# Altium PCB RF_PCB1.PcbDoc
Units mil, origin at the board's own origin, x right, y up, seen from the top; angles counter-clockwise.
Board outline 6000 x 4000 mil, 2 copper layers (Top Layer, Bottom Layer); 73 components, 50 nets, 311 pads, 15 vias.
Unrouted connection lines stored in the file: 181.
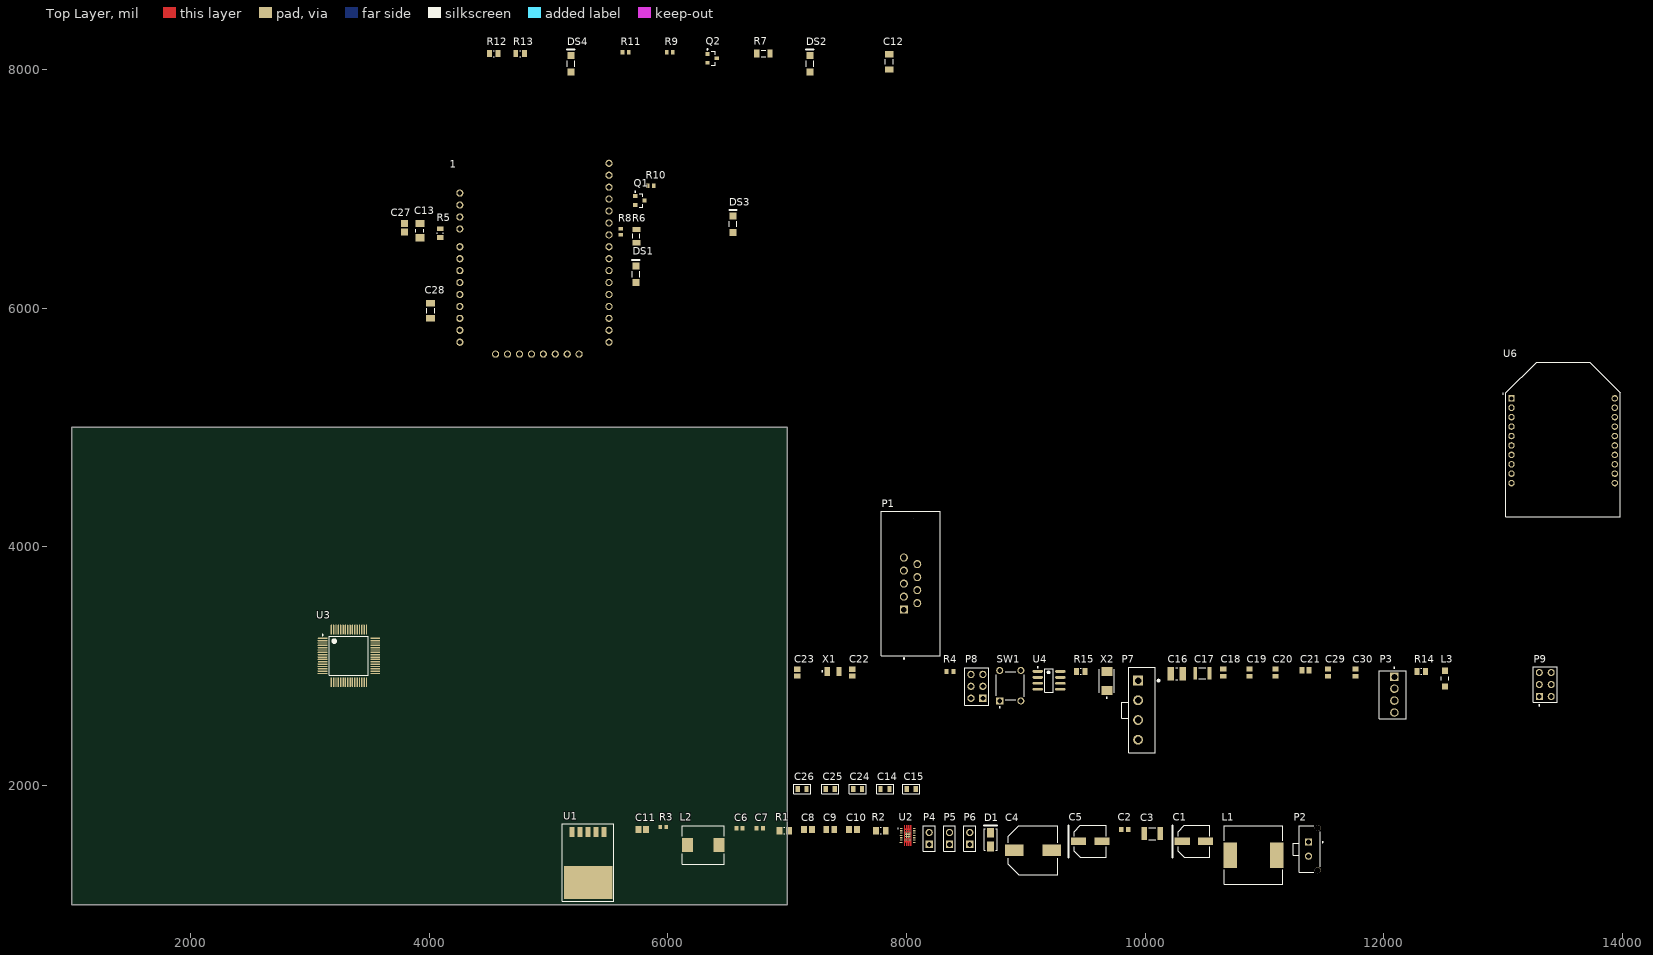
[diagram p0: Top Layer view]
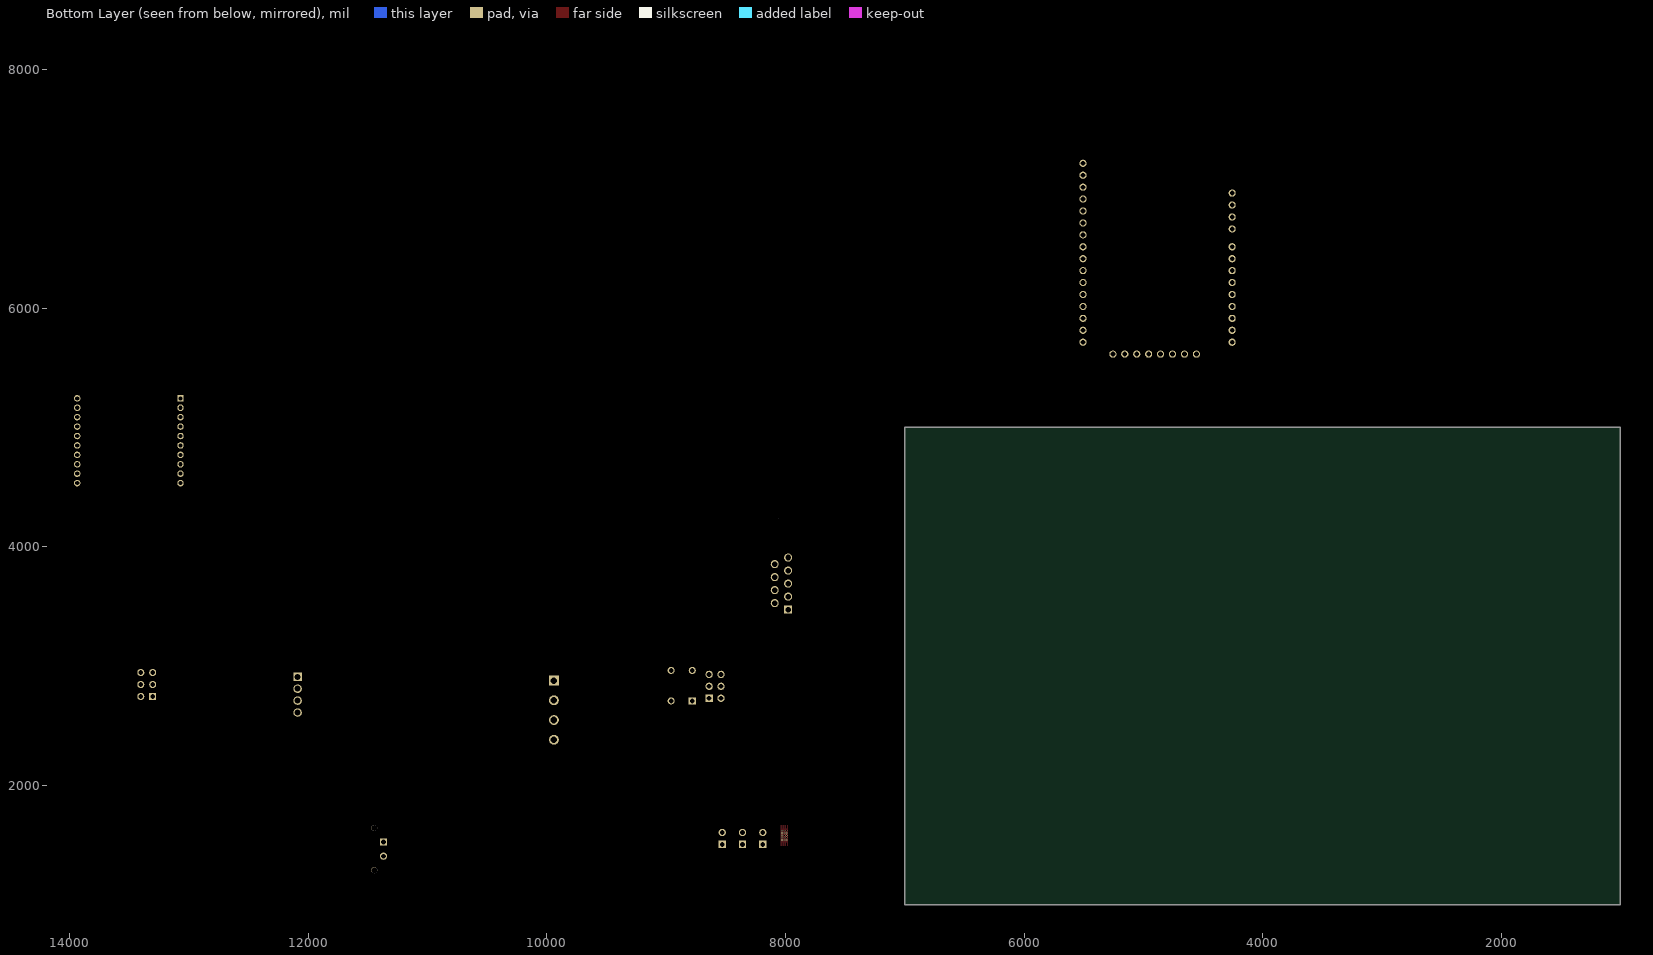
[diagram p1: Bottom Layer view, seen from below]

## Layer stack, top to bottom
Top Solder: solder mask 0.4, Solder Resist, Dk 3.5
Top Layer: signal copper 1.4
Dielectric 1: dielectric 12.6, FR-4, Dk 4.8
Bottom Layer: signal copper 1.4
Bottom Solder: solder mask 0.4, Solder Resist, Dk 3.5

## Board outline
1000,1000 7000,1000 7000,5000 1000,5000

## Design rules (kind name [scope] priority, off if disabled: settings)
Clearance [All] p1: gap=6 ignorepadtopadclearanceinfootprint=FALSE
HoleSize [All] p1: absolutevalues=TRUE maxlimit=3937.01 minlimit=15.75 maxpercent=80.000 minpercent=20.000
PolygonConnect [All] p1: connectstyle=Relief reliefconductorwidth=10 reliefentries=4 polygonreliefangle="90 Angle" airgapwidth=10
RoomDefinition RF_STM [InComponentClass('RF_STM')] p1: confinementstyle=ConfineIn formatcopy=TRUE lockcomponents=FALSE outline 7045,1920 8145,1920 8145,2120 7045,2120
RoutingVias [All] p1: holewidth=15.75 width=31.5 viastyle="Through Hole" minholewidth=15.75 minwidth=23.62 maxholewidth=3937.01 maxwidth=3937.01
SilkToSilkClearance [All] p1: silktosilkclearance=0
SilkToSolderMaskClearance [IsPad] p1: minsilkscreentomaskgap=0 clearancetoexposedcopper=TRUE
SolderMaskExpansion [All] p1: expansion=4
Width solarwidth [All] p1 off: maxlimit=10 minlimit=5 preferedwidth=5 minimp=50.000000 maximp=50.000000 favimp=50.000000
Width [All] p2: maxlimit=100 minlimit=6 preferedwidth=6 minimp=50.000000 maximp=50.000000 favimp=50.000000
27 further rules are at their usual default settings.

## Classes and differential pairs
component class RF_Xbee: 1 C12 C13 C27 C28 DS1 DS2 DS3 DS4 Q1 Q2 R5 R6 R7 R8 R9 R10 R11 R12 R13 U6
component class RF_STM: C14 C15 C16 C17 C18 C19 C20 C21 C22 C23 C24 C25 C26 C29 C30 L3 P1 P3 P7 P8 P9 R4 R14 R15 SW1 U3 U4 X1 X2
component class RF_Power: C1 C2 C3 C4 C5 C6 C7 C8 C9 C10 C11 D1 L1 L2 P2 P4 P5 P6 R1 R2 R3 U1 U2

## Components (designator, comment, footprint, x,y, rotation, side; value= is the part's Value field where it differs from the comment)
1 "XBEE_SMD_ADAPTER" XBEE_SMD_ADAPTER 4905,6465 r0 top
C1 "47uF" PNSC-FP-V-D_V 10410,1529.72 r0 top
C2 "0.1uF" CAPC1608X90X35ML10T15 9830,1629.72 r0 top
C3 "100uF" MURA-1210_H_2.7_M 10060,1594.72 r0 top
C4 "680uF" NIC-CAPA2-10X10_V 9060,1454.72 r0 top
C5 "47uF" PNSC-FP-V-D_V 9540,1529.72 r0 top
C6 "10uF" CAPC1608X90X35NL10T15 6600,1639.72 r0 top
C7 "10uF" CAPC1608X90X35NL10T15 6770,1639.72 r0 top
C8 "22uF" CAPC2013X140X45NL15T25 7175,1629.72 r0 top
C9 "22uF" CAPC2013X140X45NL15T25 7360,1629.72 r0 top
C10 "22uF" CAPC2013X140X45NL15T25 7550,1629.72 r0 top
C11 "C0805C104K5RACTU" CAPC2013X88X50NL20T25 5785,1629.72 r0 top
C12 "0.01uF" CAPC1206(3216)170_M 7855,8065 r90 top value=10nF
C13 "1uF" CAPC3216X180X50ML20T25 3920,6650 r270 top
C14 "0.1uF" C0805 7820,1970 r0 top
C15 "1uF" C0805 8040,1970 r0 top
C16 "10uF" CAPC3326X280X60LL40T25 10265,2935 r0 top
C17 "1uF" CAPC3225X270X30LL30 10480,2940 r0 top
C18 "0.1uF" CAPC2013X135X50LL10T20 10655,2945 r90 top
C19 "0.1uF" CAPC2013X135X50LL10T20 10875,2945 r90 top
C20 "0.1uF" CAPC2013X135X50LL10T20 11095,2945 r90 top
C21 "0.1uF" CAPC2013X135X50LL10T20 11345,2965 r0 top
C22 "6nF" CAPC2013X140X50LL20T25 7545,2945 r90 top
C23 "6nF" CAPC2013X140X50LL20T25 7085,2945 r90 top
C24 "20pF" C0805 7590,1970 r0 top
C25 "20pF" C0805 7360,1970 r0 top
C26 "0.1uF" C0805 7125,1970 r0 top
C27 "100pF" CAPC2013X88X50ML20T25 3790,6675 r270 top
C28 "0.01uF" CAPC1206(3216)170_M 4010,5980 r90 top value=10nF
C29 "0.1uF" CAPC2013X135X50LL10T20 11535,2945 r90 top
C30 "0.1uF" CAPC2013X135X50LL10T20 11765,2945 r90 top
D1 "SMAJ36A" LFUS-DO-214AC-2_L 8705,1544.72 r90 top
DS1 "HSMH-C150" AVAG-HSMX-C150_V 5730,6285 r90 top
DS2 "HSMH-C150" AVAG-HSMX-C150_V 7190,8050 r90 top
DS3 "HSMH-C150" AVAG-HSMX-C150_V 6545,6705 r90 top
DS4 "HSMH-C150" AVAG-HSMX-C150_V 5185,8050 r90 top
L1 "7447709101" WE-PD-XXL 10910,1414.72 r0 top
L2 "7443340150" WE-HCC-8070 6295,1499.72 r0 top
L3 "7427921" SMD-1206 12515,2895 r90 top
P1 "171-009-113R911" NORCO-171-009-113R911_V 8034.09,3691.42 r90 top
P2 "66200211122" 66200211122 11380,1464.72 r90 top
P3 "640456-4" TECO-640456-4 12090,2760 r90 top
P4 "12V EXT" SMTC-TSW-102-26-XX-S 8190,1504.72 r90 top
P5 "5V EXT" SMTC-TSW-102-26-XX-S 8360,1504.72 r90 top
P6 "3V3 EXT" SMTC-TSW-102-26-XX-S 8530,1504.72 r90 top
P7 "64900411122" 64900411122 9975,2630 r90 top
P8 "SWD" SMTC-TSW-103-08-X-D 8640,2730 r90 top
P9 "M20-9980346" HRWN-M20-9980346_V 13355,2845 r90 top
Q1 "BJT" ONSC-SOT-23-3-318-08_V 5764.37,6902.6 r0 top
Q2 "BJT" ONSC-SOT-23-3-318-08_V 6370,8095 r0 top
R1 "1M" RESC2013X50X30ML20T20 6975,1619.72 r0 top
R2 "1M" RESC2013X50X30ML20T20 7785,1619.72 r0 top
R3 "180K" RESC1608X55X30LL15T15 5960,1649.72 r0 top
R4 "1K" RESC1608X55X25ML10T15 8365,2955 r0 top
R5 "1K" RESC2013X50X30NL20T20 4090,6630 r270 top
R6 "464 Ohm" RESC3216X70X50NL05T20 5735,6605 r270 top
R7 "464 Ohm" RESC3216X70X50NL05T20 6800,8135 r0 top
R8 "10K" RESC1609X50X30NL8T20 5605,6640.59 r90 top
R9 "10K" RESC1609X50X30NL8T20 6015,8145 r0 top
R10 "10K" RESC1609X50X30NL8T20 5855.59,7025 r0 top
R11 "10K" RESC1609X50X30NL8T20 5645,8145 r0 top
R12 "1K" RESC2013X50X30NL20T20 4540,8135 r0 top
R13 "1K" RESC2013X50X30NL20T20 4760,8135 r0 top
R14 "1K" RESC2013X50X30NL20T20 12315,2955 r0 top
R15 "1K" RESC2013X50X30NL20T20 9460,2955 r0 top
SW1 "PTS645SM43SMTR92LFS" ITT-PTS645S-4_V 8870,2835 r90 top
U1 "LM2576SX-5.0" TO263-5 5330,1480 r270 top
U2 "TPS63020DSJT" DSJ14-4000X1580TP_V 8010,1579.72 r0 top
U3 "STM32F107RCT6" STM-LQFP64_M 3325,3085 r0 top
U4 "MCP2551-I/SN" SOIC-SN8_N 9195,2880 r0 top
U6 "XBP24CAUIT-001" *MODULE_XBP24CAUIT-001 13505,4900 r0 top
X1 "32.768KHz" ABRA-ABS07-2_V 7385,2955 r0 top
X2 "8MHz" ABRA-ABM3-2_V 9680,2875 r90 top

## Footprints (in the part's own frame and the unit in brackets; to place one, negate y for a bottom-side part, rotate by r counter-clockwise, add the part's x,y. Pads: shape width x height; smd on the part's side, far side on the other; paste and mask are expansions set on the pad)
64900411122 [mm] "4.20mm Male Single Row Vertical Header, 4p"
  rect 2.1x2.1 hole 1.4: 1(6.3,0.85)
  round 2.1 hole 1.4: 2(2.1,0.85) 3(-2.1,0.85) 4(-6.3,0.85)
  silkscreen extent -9.1,-3.7 9.1,4.3, body extent -9,-2.7 9,4.2, height 12.83
66200211122 [mm] "3.00mm Male Single Row Vertical Header, 2p"
  rect 1.52x1.52 hole 1.02: 1(1.5,0.255)
  round 1.52 hole 1.02: 2(-1.5,0.255)
  round 1.27 hole 1.27 unplated: MH1(-4.5,-1.705) MH2(4.5,-1.705)
  silkscreen extent -4.95,-2.88 4.95,3.46, body extent -4.83,-2.18 4.83,3.38, height 9.93
*MODULE_XBP24CAUIT-001 [mil]
  rect 54.25x54.25 hole 34.25: 1(-433,344.5)
  round 54.25 hole 34.25: 2(-433,265.5) 3(-433,186.5) 4(-433,107.5) 5(-433,28.5) 6(-433,-50.5) 7(-433,-129.5) 8(-433,-208.5) 9(-433,-287.5) 10(-433,-366.5) 11(433,-366.5) 12(433,-287.5) 13(433,-208.5) 14(433,-129.5) 15(433,-50.5) 16(433,28.5) 17(433,107.5) 18(433,186.5) 19(433,265.5) 20(433,344.5)
  silkscreen extent -508,-648 480,648
ABRA-ABM3-2_V [mm] "SMD, 2-Leads, Body 5x3.2mm, Pitch 4.1mm"
  rect 1.9x2.4 smd: 1(-2.05,0) 2(2.05,0)
  silkscreen extent -3.67,-1.6 2.5,1.6, body extent -2.5,-1.6 2.5,1.6, height 1.3
ABRA-ABS07-2_V [mm] "Hand Drawn, 2-Leads, Body 3.2x1.5mm, Pitch 2.5mm"
  rect 1.1x1.9 smd: 1(-1.25,0) 2(1.25,0)
  silkscreen extent -2.47,-0.12 -2.22,0.12, body extent -1.6,-0.75 1.6,0.75, height 0.9
AVAG-HSMX-C150_V [mm] "SMD, 2-Leads, Body 3.2x1.6mm"
  rect 1.5x1.5 smd: 1(-1.75,0) 2(1.75,0)
  silkscreen extent -0.6,-0.8 3,0.8, body extent -1.6,-0.8 1.6,0.8, height 1.1
C0805 [mm]
  rect 0.9x1.3 smd: 1(-0.95,0) 2(0.95,0)
  silkscreen extent -1.8,-1 1.8,1, body extent -1.05,-0.67 1.05,0.67, height 0.94
CAPC1206(3216)170_M [mm] "Chip Capacitor, Body 3.2x1.6mm, Height 1.7mm, IPC Low Density"
  rect 1.35x1.9 smd: 1(-1.6,0) 2(1.6,0)
  silkscreen extent -0.55,-0.85 0.55,0.85, body extent -1.7,-0.9 1.7,0.9, height 1.7
CAPC1608X90X35ML10T15 [mm] "Chip Capacitor, 2-Leads, Body 1.7x0.9mm, IPC Low Density"
  rect 0.95x1.05 smd: 1(-0.725,0) 2(0.725,0)
  body extent -0.85,-0.45 0.85,0.45, height 0.9
CAPC1608X90X35NL10T15 [mm] "Chip Capacitor, 2-Leads, Body 1.60x0.80mm, IPC Medium Density"
  rect 0.85x0.95 smd: 1(-0.675,0) 2(0.675,0)
  body extent -0.85,-0.45 0.85,0.45, height 0.9
CAPC2013X88X50ML20T25 [mm] "Chip Capacitor, 2-Leads, Body 2.00x1.25mm, IPC Low Density"
  rect 1.5x1.55 smd: 1(-0.9,0) 2(0.9,0)
  body extent -1.1,-0.72 1.1,0.72, height 0.88
CAPC2013X88X50NL20T25 [mm] "Chip Capacitor, 2-Leads, Body 2.00x1.25mm, IPC Medium Density"
  rect 1.3x1.45 smd: 1(-0.8,0) 2(0.8,0)
  body extent -1.1,-0.72 1.1,0.72, height 0.88
CAPC2013X135X50LL10T20 [mm] "Chip Capacitor, 2-Leads, Body 2.00x1.25mm, IPC High Density"
  rect 1x1.3 smd: 1(-0.75,0) 2(0.75,0)
  body extent -1.05,-0.67 1.05,0.68, height 1.35
CAPC2013X140X45NL15T25 [mm] "Chip Capacitor, 2-Leads, Body 2.00x1.25mm, IPC Medium Density"
  rect 1.25x1.45 smd: 1(-0.85,0) 2(0.85,0)
  body extent -1.08,-0.7 1.07,0.7, height 1.4
CAPC2013X140X50LL20T25 [mm] "Chip Capacitor, 2-Leads, Body 2.00x1.25mm, IPC High Density"
  rect 1.1x1.35 smd: 1(-0.7,0) 2(0.7,0)
  body extent -1.1,-0.72 1.1,0.72, height 1.4
CAPC3216X180X50ML20T25 [mm] "Chip Capacitor, 2-Leads, Body 3.40x1.80mm, IPC Low Density"
  rect 1.5x1.9 smd: 1(-1.5,0) 2(1.5,0)
  silkscreen extent -0.35,-0.85 0.35,0.85, body extent -1.7,-0.9 1.7,0.9, height 1.8
CAPC3225X270X30LL30 [mm] "Chip Capacitor, 2-Leads, Body 3.5x2.7mm, IPC High Density"
  rect 0.75x2.6 smd: 1(-1.525,0) 2(1.525,0)
  silkscreen extent -0.75,-1.2 0.75,1.2, body extent -1.75,-1.35 1.75,1.35, height 2.7
CAPC3326X280X60LL40T25 [mm] "Chip Capacitor, 2-Leads, Body 3.70x2.90mm, IPC High Density"
  rect 1.4x2.8 smd: 1(-1.3,0) 2(1.3,0)
  silkscreen extent -0.2,-1.3 0.2,1.3, body extent -1.85,-1.45 1.85,1.45, height 2.8
DSJ14-4000X1580TP_V [mm] "SON, 14-Leads, Body 4.15x3.15mm, Pitch 0.5mm"
  oval 0.6x0.24 smd mask+0.07: 1(-1.4,1.5) 2(-1.4,1) 3(-1.4,0.5) 4(-1.4,0) 5(-1.4,-0.5) 6(-1.4,-1) 7(-1.4,-1.5) 8(1.4,-1.5) 9(1.4,-1) 10(1.4,-0.5) 11(1.4,0) 12(1.4,0.5) 13(1.4,1) 14(1.4,1.5)
  rect 1x1 smd paste-1: 15(0,0)
  Top Layer region: -0.79,-2.2 -0.59,-2.2 -0.59,-1.425 -0.33,-1.425 -0.33,-2.2 -0.13,-2.2 -0.13,-1.425 0.13,-1.425 0.13,-2.2 0.33,-2.2 0.33,-1.425 0.59,-1.425 0.59,-2.2 0.79,-2.2 0.79,2.2 0.59,2.2 0.59,1.425 0.33,1.425 0.33,2.2 0.13,2.2 0.13,1.425 -0.13,1.425 -0.13,2.2 -0.33,2.2 -0.33,1.425 -0.59,1.425 -0.59,2.2 -0.79,2.2
  silkscreen extent -2.15,1.45 -2.05,1.55, body extent -1.58,-2.07 1.58,2.07, height 1
HRWN-M20-9980346_V [mm] "THD, 6-Leads, Body 7.62x5.08mm, Pitch 2.54mm"
  rect 1.5x1.5 hole 1: 1(-2.54,1.27)
  round 1.5 hole 1: 2(-2.54,-1.27) 3(0,1.27) 4(0,-1.27) 5(2.54,1.27) 6(2.54,-1.27)
  silkscreen extent -4.58,-2.54 3.81,2.54, body extent -3.81,-2.54 3.81,2.54, height 8.64
ITT-PTS645S-4_V [mm] "TH, 4-Leads, Body 6x6mm"
  rect 1.5x1.5 hole 1: 1(-3.25,2.25)
  round 1.5 hole 1: 2(3.25,2.25) 3(-3.25,-2.25) 4(3.25,-2.25)
  silkscreen extent -4.67,-3 3,3, body extent -3,-3 3,3, height 4.4
LFUS-DO-214AC-2_L [mm] "Molded Diode, 2-Leads, Body 4.6x2.79mm, IPC High Density"
  rect 2.1x1.45 smd: 1(-1.45,0) 2(1.45,0)
  silkscreen extent -2.3,-1.4 3,1.4, body extent -2.52,-1.4 2.52,1.4, height 2.29
MURA-1210_H_2.7_M [mm] "Chip Capacitor, 2-Leads, Body 3.5x2.7mm, IPC Low Density"
  rect 1.15x2.8 smd: 1(-1.725,0) 2(1.725,0)
  silkscreen extent -0.75,-1.3 0.75,1.3, body extent -1.75,-1.35 1.75,1.35, height 2.7
NIC-CAPA2-10X10_V [mm] "Aluminum Electrolytic Capacitor, Diameter 10mm, Height 10.8mm, Pitch 8mm"
  rect 4x2.5 smd: 1(-4,0) 2(4,0)
  silkscreen extent -5.25,-5.25 5.25,5.25, body extent -4.96,-4.99 5,4.99, height 10.8
NORCO-171-009-113R911_V [mm] "THD, 9-Leads, Body 30.8x12.6mm, Pitch 2.77mm"
  rect 1.7x1.7 hole 1.194: 1(-5.54,1.42)
  round 1.7 hole 1.194: 2(-2.77,1.42) 3(0,1.42) 4(2.77,1.42) 5(5.54,1.42) 6(-4.155,-1.42) 7(-1.385,-1.42) 8(1.385,-1.42) 9(4.155,-1.42)
  round 2.9 hole 3.2 unplated: MH1(-12.495,0) MH2(12.495,0)
  silkscreen extent -16.08,-6.3 15.4,6.3, body extent -15.4,-6.3 15.41,6.3, height 13.24
ONSC-SOT-23-3-318-08_V [mm] "SOT23, 3-Leads, Body 2.92x1.3mm, Pitch 0.95mm"
  rect 0.9x0.8 smd: 1(-1,0.95) 2(-1,-0.95) 3(1,0)
  silkscreen extent -1.12,-1.46 0.65,2.02, body extent -0.65,-1.46 0.65,1.46, height 1.11
PNSC-FP-V-D_V [mm] "CAPAE, 2-Leads, Body 6.80x6.80mm"
  rect 3.2x1.6 smd: 1(-2.5,0) 2(2.5,0)
  silkscreen extent -4.6,-3.4 3.4,3.4, body extent -3.9,-3.4 3.9,3.4, height 6.1
RESC1608X55X25ML10T15 [mm] "Chip Resistor, 2-Leads, Body 1.60x0.80mm, IPC Low Density"
  rect 0.8x1 smd: 1(-0.75,0) 2(0.75,0)
  body extent -0.85,-0.45 0.85,0.45, height 0.55
RESC1608X55X30LL15T15 [mm] "Chip Resistor, 2-Leads, Body 1.60x0.80mm, IPC High Density"
  rect 0.7x0.85 smd: 1(-0.625,0) 2(0.625,0)
  body extent -0.87,-0.48 0.87,0.48, height 0.55
RESC1609X50X30NL8T20 [mm] "Chip Resistor, 2-Leads, Body 1.65x0.95mm, IPC Medium Density"
  rect 0.8x0.95 smd: 1(-0.65,0) 2(0.65,0)
  body extent -0.82,-0.48 0.82,0.48, height 0.5
RESC2013X50X30ML20T20 [mm] "Chip Resistor, 2-Leads, Body 2.00x1.25mm, IPC Low Density"
  rect 1.25x1.55 smd: 1(-1.025,0) 2(1.025,0)
  silkscreen extent -0.1,-0.67 0.1,0.67, body extent -1.1,-0.72 1.1,0.72, height 0.5
RESC2013X50X30NL20T20 [mm] "Chip Resistor, 2-Leads, Body 2.00x1.25mm, IPC Medium Density"
  rect 1.05x1.45 smd: 1(-0.925,0) 2(0.925,0)
  silkscreen extent -0.1,-0.63 0.1,0.63, body extent -1.1,-0.72 1.1,0.72, height 0.5
RESC3216X70X50NL05T20 [mm] "Chip Resistor, 2-Leads, Body 3.20x1.60mm, IPC Medium Density"
  rect 1.1x1.65 smd: 1(-1.425,0) 2(1.425,0)
  silkscreen extent -0.5,-0.72 0.5,0.72, body extent -1.63,-0.82 1.62,0.82, height 0.7
SMD-1206 [mm] "Chip Inductor, 2-Leads, Body 3.2x1.6mm"
  rect 1.35x1.2 smd: 1(-1.675,0) 2(1.675,0)
  silkscreen extent -0.35,-0.8 0.35,0.8, body extent -1.6,-0.8 1.6,0.8, height 1.09
SMTC-TSW-102-26-XX-S [mm] ".025 SQ Post Terminal Strip Assembly, 1x2 Pins, Vertical, 2.54mm Pitch, Male"
  rect 1.55x1.55 hole 1.02: 1(0,0)
  round 1.55 hole 1.02: 2(2.54,0)
  silkscreen extent -1.46,-1.27 4,1.27, body extent -1.4,-1.27 3.81,1.27, height 8.38
SMTC-TSW-103-08-X-D [mm] ".025 SQ Post Terminal Strip Assembly, 2x3 Pins, Vertical, 2.54mm Pitch, Male"
  rect 1.55x1.55 hole 1.02: 1(0,0)
  round 1.55 hole 1.02: 2(0,2.54) 3(2.54,0) 4(2.54,2.54) 5(5.08,0) 6(5.08,2.54)
  silkscreen extent -1.46,-1.27 6.54,3.81, body extent -1.27,-1.27 6.35,3.81, height 8.38
SOIC-SN8_N [mm] "SOIC, 8-Leads, Body 4.9x3.9mm, Pitch 1.27mm, IPC Medium Density"
  oval 2.2x0.6 smd: 1(-2.4,1.905) 2(-2.4,0.635) 3(-2.4,-0.635) 4(-2.4,-1.905) 5(2.4,-1.905) 6(2.4,-0.635) 7(2.4,0.635) 8(2.4,1.905)
  silkscreen extent -2.52,-2.5 0.9,2.88, body extent -2,-2.5 2,2.5, height 1.75
STM-LQFP64_M [mm] "Thin QFP, 64-Leads, Body 10x10mm, Pitch 0.5mm, IPC Low Density"
  oval 2.1x0.3 smd: 1(-5.6,3.75) 2(-5.6,3.25) 3(-5.6,2.75) 4(-5.6,2.25) 5(-5.6,1.75) 6(-5.6,1.25) 7(-5.6,0.75) 8(-5.6,0.25) 9(-5.6,-0.25) 10(-5.6,-0.75) 11(-5.6,-1.25) 12(-5.6,-1.75) 13(-5.6,-2.25) 14(-5.6,-2.75) 15(-5.6,-3.25) 16(-5.6,-3.75) 33(5.6,-3.75) 34(5.6,-3.25) 35(5.6,-2.75) 36(5.6,-2.25) 37(5.6,-1.75) 38(5.6,-1.25) 39(5.6,-0.75) 40(5.6,-0.25) 41(5.6,0.25) 42(5.6,0.75) 43(5.6,1.25) 44(5.6,1.75) 45(5.6,2.25) 46(5.6,2.75) 47(5.6,3.25) 48(5.6,3.75)
  oval 0.3x2.1 smd: 17(-3.75,-5.6) 18(-3.25,-5.6) 19(-2.75,-5.6) 20(-2.25,-5.6) 21(-1.75,-5.6) 22(-1.25,-5.6) 23(-0.75,-5.6) 24(-0.25,-5.6) 25(0.25,-5.6) 26(0.75,-5.6) 27(1.25,-5.6) 28(1.75,-5.6) 29(2.25,-5.6) 30(2.75,-5.6) 31(3.25,-5.6) 32(3.75,-5.6) 49(3.75,5.6) 50(3.25,5.6) 51(2.75,5.6) 52(2.25,5.6) 53(1.75,5.6) 54(1.25,5.6) 55(0.75,5.6) 56(0.25,5.6) 57(-0.25,5.6) 58(-0.75,5.6) 59(-1.25,5.6) 60(-1.75,5.6) 61(-2.25,5.6) 62(-2.75,5.6) 63(-3.25,5.6) 64(-3.75,5.6)
  silkscreen extent -5.72,-4.15 4.15,4.57, body extent -5,-5 5,5, height 1.6
TECO-640456-4 [mm] "Through Hole, 4-Leads, Body 10.16x5.72mm, Pitch 2.54mm"
  rect 1.8x1.8 hole 1.27 paste+0: 1(3.81,0)
  round 1.8 hole 1.27 paste+0: 2(1.27,0) 3(-1.27,0) 4(-3.81,0)
  silkscreen extent -5.08,-2.54 5.86,3.18, body extent -5.08,-2.54 5.08,3.18, height 10.03
TO263-5 [mm]
  rect 2.16x1.07 smd: 1(-3.25,3.4) 2(-3.25,1.7) 3(-3.25,0) 4(-3.25,-1.7) 5(-3.25,-3.4)
  rect 6.99x10.3 smd: 6(7.5,0)
  silkscreen extent -5,-5.5 11.5,5.5, body extent -3.81,-5 12.5,4.91, height 4.22
WE-HCC-8070 [mm] "Inductor, 2-Leads, Body 8.4 x 7.9 mm"
  rect 2.3x3 smd: 1(-3.35,0) 2(3.35,0)
  silkscreen extent -4.45,-4.1 4.45,4.1, body extent -4.2,-3.96 4.2,3.94, height 7.15
WE-PD-XXL [mm] "SMD Inductor, 2-Leads, Body 12.0 x 12.0 mm"
  rect 2.9x5.4 smd: 1(-4.95,0) 2(4.95,0)
  silkscreen extent -6.25,-6.25 6.25,6.25, body extent -6,-6 6,6, height 10.36
XBEE_SMD_ADAPTER [mil]
  round 60.24 / inner round 60 / far side round 60.24 hole 40.16: 1(-650,500) 2(-650,400) 3(-650,300) 4(-650,200) 5(-650,50) 6(-650,-50) 7(-650,-150) 8(-650,-250) 9(-650,-350) 10(-650,-450) 11(-650,-550) 12(-650,-650) 13(-650,-750) 14(-350,-850) 15(-250,-850) 16(-150,-850) 17(-50,-850) 18(50,-850) 19(150,-850) 20(250,-850) 21(350,-850) 22(600,-750) 23(600,-650) 24(600,-550) 25(600,-450) 26(600,-350) 27(600,-250) 28(600,-150) 29(600,-50) 30(600,50) 31(600,150) 32(600,250) 33(600,350) 34(600,450) 35(600,550) 36(600,650) 37(600,750)

## Part data
C1 C5: library part CMP-2000-06216-1, "Aluminum Electrolytic Capacitor, 47 uF, +/- 20%, 35 V, 2-Pin SMD (Size Code D), -55 to 105 degC, RoHS, Tape and Reel", Capacitance=47µF, Case Size/Dimension=Ø6.3x5.8mm, ESR (Equivalent Series Resistance)=0.26O, Lifetime@Temperature=2000Hrs@105°C, Manufacturer=Panasonic, Operating Temp-Max=105°C, Operating Temp Range=-55to+105°C, Package Description="2-Pin Electrolytic Aluminum Capacitor, Body 6.6 x 6.6 mm", Package Reference=FP-V-D, Rated Voltage=35V, Ripple Current=300mA, Datasheet URL=http://industrial.panasonic.com/cdbs/www-data/pdf/RDE0000/ABA0000C1184.pdf, Datasheet Version=03/2016, Manufacturer URL=http://www.panasonic.com/, Mounting Technology=SurfaceMount, Package URL=http://industrial.panasonic.com/cdbs/www-data/pdf/RDE0000/DME0000COL48.pdf, Series=FP, Type=Can
C2: library part CMP-2000-04945-1, "Chip Capacitor, 22 pF, +/- 5%, 50 V, -55 to 125 degC, 0603 (1608 Metric), RoHS, Tape and Reel", Capacitance=22pF, Case Size/Dimension=0603, Dielectric=C0G, Manufacturer=Murata, Package Description="2-Pin Surface Mount Device, Body 1.6 x 0.8 mm", Package Reference=603, Rated Voltage=50V, Tolerance (%)=±5%, Datasheet URL=https://datasheet.ciiva.com/11786/0900766b807a1cab-11786398.pdf, Datasheet Version=Jul-06, Manufacturer URL=http://www.murata.com/
C3: library part CMP-2000-05259-1, "CAP, Ceramic, 100 uF, 20%, 6.3 V, 1210, RoHS, Tape and Reel", Dielectric=X5R, Manufacturer=MurataElectronics, Operating Temperature=-55to85degC, Package/Case=1210, Package Description="2-Pin Surface Mount Device, Body 3.2 x 2.5 mm", Tolerance=20%, Voltage=6.3Vdc, Capacitance Value=100uF, Category=CapacitorCeramicMultilayer, Construction=Flat, Datasheet URL=https://datasheet.ciiva.com/29199/455114-da-01-en-vs-kondensator-1210-29199468.pdf, Datasheet Version=Dec-10, Manufacturer URL=http://www.murata.com/, Mounting=SurfaceMount, Package Reference=1210, Product Depth=2.5mm, Product Height=2.5mm, Product Length=3.2mm, Rad Hard=No, Type=Flat
C4: library part CMP-0687-00005-1, "Aluminum Electrolytic Capacitor, UD Series, Low Impedance, 680 uF, 16 V, + / - 20%, -55 to 105 degC, Chip Type, 10 x 10 mm D x L, Pb-Free, Reel", Manufacturer=Nichicon, PartNumber=UUD1C681MNL1GS, Rated Capacitance="680 uF", Rated Ripple Current (at 100kHz)="670 mA", Rated Voltage="16 V", Tolerance Rated Capacitance="-20 to 20%", ComponentLink1Description="Manufacturer URL", ComponentLink1URL=http://www.nichicon.co.jp/, ComponentLink2Description=Datasheet, ComponentLink2URL=http://products.nichicon.co.jp/en/pdf/XJA043/e-ud.pdf, ComponentLink3Description="Package Specification", ComponentLink3URL=http://products.nichicon.co.jp/en/pdf/XJA043/e-ud.pdf, DatasheetVersion=08/2012, Diameter="10 mm", Endurance Time="5000 h", Impedance="0.09 Ohm", Length="10 mm", Mounting Technology="Surface Mount", PackageDescription="2-Pin Surface Mount Device, Diameter 10 mm, Height 10 mm, Pitch 8 mm", PackageReference=CAPAE-D10H10, Packing="Dia382mm Reel", RoHS=TRUE
C6 C7: library part CMP-2006-02792-1, Manufacturer=Murata, Part Number=GRM188R60J106ME47D
C8 C9 C10: library part CMP-2007-03385-1, Manufacturer=Murata, Part Number=GRM21BR60J226ME39L
C11: library part CMP-2007-00279-1, Manufacturer=Kemet, Part Number=C0805C104K5RACTU
C12 C28: library part CMP-1037-03508-1, "CAP 10nF 50V ±5% 1206 (3216 Metric) Thickness 1.7mm SMD", Case-EIA=1206, Case-Metric=3216, Rated Voltage="50 V", Tolerance=±5%, Max Thickness="1.7 mm", Technology=SMT
C13: library part CMP-2000-04991-1, "Chip Capacitor, 1 uF, +/- 10%, 25 V, -55 to 125 degC, 1206 (3216 Metric), RoHS, Tape and Reel", Capacitance - nF=1000nF, Case Code - in=1206, Case Code - mm=3216, Case Height=1.6mm, Case Length=3.2mm, Dielectric=X7R, Manufacturer=Kemet, Maximum Operating Temperature=+125C, Minimum Operating Temperature=-55C, Operating Temperature Range=-55Cto+125C, Package / Case=1206(3216metric), Package Description="2-Pin Surface Mount Device, Body 3.2 x 1.6 mm", Temperature Coefficient / Code=+/-15%, Tolerance=10%, Voltage Rating=25V, =C1206C105K3RAC7800, Brand=Kemet, Capacitance=1uF, Case Width=1.6mm, Class=Class1, Datasheet URL=https://ciiva.com/datasheet-click-18194173?src=ciiva&sig=6daff8c4, Datasheet Version=Jul-14, Dimensions=1.6mmWx3.2mmLx1.6mmH, Factory Pack Quantity=2000, Manufacturer URL=http://www.kemet.com/, Package Reference=1206, Packaging=Reel, Product=GeneralTypeMLCCs, Product Category=MultilayerCeramicCapacitorsMLCC-SMD/SMT, RoHS=Details, Series=C1206C, Termination Style=SMD/SMT, Type=SMDMLCCX7R6.3-250VDCCommericalGrade, Voltage Rating DC=25V
C14 C26: library part CL21B104KBCWPNC, "CAP CER 0.1UF 50V X7R 0805", Capacitance=100nF, Case/Package=0805, Case Code (Metric)=2012, Manufacturer=Samsung, Max Operating Temperature=125°C, Min Operating Temperature=-55°C, Ratings=AEC-Q200, Supplier Part Number 1=1276-6557-1-ND, Tolerance=10%, Voltage Rating=50V, Case Code (Imperial)=0805, Category=Capacitors, Features="Soft Termination", Length=0.079inch, Manufacturer Part Number=CL21B104KBCWPNC, Mount="Surface Mount", Packaging="Tape and Reel", Pricing 1="1 = 0.10000, 10 = 0.06700, 100 = 0.02990, 500 = 0.02138, 1000 = 0.01680 (USD)", RoHS=Yes, Stock 1=6545, Supplier 1=Digi-Key, Thickness=0.053inch, Width=0.049inch
C15: library part CL21B105KAFNNNE, "Cap Ceramic 1uF 25V X7R 10% SMD 0805 125C T/R", Case/Package=0805, Case Code (Metric)=2012, Dielectric=X7R, Manufacturer=Samsung, Max Operating Temperature=125°C, Min Operating Temperature=-55°C, Package Quantity=1, Supplier Part Number 1=1276-1066-1-ND, Tolerance=10%, Voltage=25V, Capacitance=1uF, Case Code (Imperial)=0805, Category=Capacitors, ComponentLink1Description=https://datasheet.ciiva.com/25800/cl21b105kafnnne-25800163.pdf?src-supplier=Digi-Key, ComponentLink1URL=https://datasheet.ciiva.com/25800/cl21b105kafnnne-25800163.pdf?src-supplier=Digi-Key, ComponentLink2Description=https://datasheet.ciiva.com/15195/getdatasheetpartid-355205-15195880.pdf?src-supplier=Verical, ComponentLink2URL=https://datasheet.ciiva.com/15195/getdatasheetpartid-355205-15195880.pdf?src-supplier=Verical, Contact Plating=Tin, Depth=1.25mm, Height=1.25mm, Lead Free="Lead Free", Length=2mm, Manufacturer Part Number=CL21B105KAFNNNE, Mount="Surface Mount", Packaging="Tape and Reel", Pricing 1="1 = 0.10000, 10 = 0.07600, 100 = 0.03380, 500 = 0.02416, 1000 = 0.01898 (USD)", Radiation Hardening=No, RoHS=Yes, Stock 1=1606570, Supplier 1=Digi-Key, Thickness=0.053inch, Voltage Rating=25V, Voltage Rating (DC)=25V, Width=0.049inch
C16: library part CMP-2000-06021-1, "Chip Capacitor, 10 uF, +/- 10%, 25 V, -55 to 125 degC, 1210 (3225 Metric), RoHS, Tape and Reel", Capacitance=10µF, Manufacturer=Kemet, Operating Temperature=-55°C~125°C, Package / Case=1210(3225Metric), Package Description="2-Pin Surface Mount Device, Body 3.3 x 2.6 mm", Package Reference=1210, Ratings=-, Standard Package=1, Temperature Coefficient=X7R, Tolerance=±10%, Voltage - Rated=25V, Applications=BoardflexSensitive, Category=Capacitors, Datasheet URL=http://www.kemet.com/docfinder?Partnumber=C1210X106K3RACTU, Datasheet Version=02/2016, Family=CeramicCapacitors, Features=SoftTermination, Height - Seated (Max)=-, Lead Spacing=-, Lead Style=-, Manufacturer URL=http://www.kemet.com/, Mounting Technology=SurfaceMount, Mounting Type=SurfaceMount,MLCC, Online Catalog=FT-CAP, Other Names=399-8241-6, Packaging=Digi-Reel®, Product Training Modules=CapacitorBasics-TypicalUsesforCapacitors, Series=FT-CAP, Size / Dimension="0.126\"Lx0.098\"W(3.20mmx2.50mm)", Thickness (Max)="0.110\"(2.80mm)"
C17: library part CMP-2000-06366-1, "Chip Capacitor, 1 uF, +/- 10%, 100 V, -55 to 125 degC, 1210 (3225 Metric), RoHS, Tape and Reel", Capacitance=1µF, Manufacturer=Murata, Operating Temperature=-55°C~125°C, Package / Case=1210(3225Metric), Package Description="2-Pin Surface Mount Device, Body 3.2 x 2.5 mm", Package Reference=1210, Ratings=-, Standard Package=1, Temperature Coefficient=X7R, Tolerance=±10%, Voltage - Rated=100V, Applications=GeneralPurpose, Catalog Drawings=GRMSeries_1210_2.5, Category=Capacitors, Datasheet URL=http://search.murata.co.jp/Ceramy/image/img/A01X/G101/ENG/GRM32ER72A105KA01-01.pdf, Datasheet Version=02/2016, Family=CeramicCapacitors, Featured Product=GA3SafetyRecognizedCapsandHi-CapMLCC, Features=-, Height - Seated (Max)=-, Lead Spacing=-, Lead Style=-, Manufacturer URL=http://www.murata.com/, Mounting Technology=SurfaceMount, Mounting Type=SurfaceMount,MLCC, Online Catalog=GRMSeries, Other Names=490-1857-6, Packaging=Digi-Reel®, Product Training Modules=High-CapMultilayerCeramicCapacitors, Series=GRM, Size / Dimension="0.126\"Lx0.098\"W(3.20mmx2.50mm)", Thickness (Max)="0.106\"(2.70mm)"
C18 C19 C20 C21 C29 C30: library part CMP-2007-03453-1, Manufacturer=Murata, Part Number=GRM21BR61C106KE15L
C22 C23: library part CMP-2000-05810-1, "Chip Capacitor, 2.2 uF, +/- 10%, 10 V, -55 to 85 degC, 0805 (2012 Metric), RoHS, Tape and Reel", Capacitance=2.2µF, Case Size/Dimension=0805, Dielectric=X5R, Manufacturer=AVX, Package Description="2-Pin Surface Mount Device, Body 2.01 x 1.25 mm", Rated Voltage=10V, Tolerance (%)=±10%, Datasheet URL=http://datasheets.avx.com/cx5r.pdf, Datasheet Version=05/2016, Manufacturer URL=http://www.avx.com/, Mounting Technology=SurfaceMount, Package Reference=0805
C24 C25: library part C0805C200J5GACTU, "CAP CER 20PF 50V C0G/NP0 0805", Capacitance=10nF, Case/Package=0805, Case Code (Metric)=2012, Dielectric=X7R, Manufacturer=Samsung, Manufacturer Part Number=CL21B103KBANNNC, Max Operating Temperature=125°C, Min Operating Temperature=-55°C, Supplier Part Number 1=399-8033-1-ND, Tolerance=10%, Voltage=50V, Case Code (Imperial)=0805, Category=Capacitors, ComponentLink1Description=https://www.digikey.com/product-detail/en/kemet/C0805C200J5GACTU/399-8033-1-ND/3471756, ComponentLink1URL=https://www.digikey.com/product-detail/en/kemet/C0805C200J5GACTU/399-8033-1-ND/3471756, Contact Plating=Tin, Depth=1.25mm, Height=0.65mm, Lead Free="Lead Free", Length=2mm, Material=Ceramic, Mount="Surface Mount", Packaging="Tape and Reel", Radiation Hardening=No, RoHS=Yes, Supplier 1=Digi-Key, Thickness=0.03inch, Voltage Rating=50V, Voltage Rating (DC)=50V, Width=0.049inch
C27: library part CMP-2007-00223-1, Manufacturer=Kemet, Part Number=C0805C101J2GACTU
D1: library part CMP-2000-07089-1, "Transient Voltage Suppression Diode, 400 W, 36 V, -65 to 150 degC, 2-Pin SMD, RoHS, Tape and Reel", Breakdown Voltage-Max=44.2V, Breakdown Voltage-Min=40V, Clamping Voltage-Max=58.1V, Manufacturer=Littelfuse, Package Description="2-Pin Surface Mount Device, Body 4.295 x 2.595 mm", Package Reference=DO-214AC, Power Dissipation=400W, Datasheet URL=http://www.littelfuse.com/~/media/electronics/datasheets/tvs_diodes/littelfuse_tvs_diode_smaj_datasheet.pdf.pdf, Datasheet Version=11/2015, Directional=Uni-Directional, Manufacturer URL=http://www.littelfuse.com/, Mounting Technology=SurfaceMount
DS1 DS2 DS3 DS4: library part CMP-2000-06426-1, "LED Uni-Color Red, 65 mW, 25 mA, -40 to 85 degC, 2-Pin SMD, RoHS, Tape and Reel", Emitting Color=Red, Forward Current=25mA, Forward Voltage=2.6V, Manufacturer=Avago, Operating Temperature Classification=Industrial, Operating Temp Range=-40Cto85C, Package Description="2-Pin Surface Mount Device, Body 3.2 x 1.6 mm", Package Reference=HSMX-C150, Package Type=ChipLed, Power Dissipation=78W, Reverse Voltage=5V, Test Current (It)=20mA, Chip Material=GaAlAs, Datasheet URL=http://media.digikey.com/pdf/Data%20Sheets/Avago%20PDFs/HSMz-Czzz.pdf, Datasheet Version=03/2012, DELETED=Compliant, Dominant Wave Length=639nm, High Brightness=No, Lens Dimensions=2x1.6x0.6mm, Lens Type=ColorlessDiffused, Luminous Intensity=17mcd, Lum Intensity=17mcd, Main Category=ChipLED, Manufacturer URL=http://www.avagotech.com/, Mounting=SurfaceMount, Mounting Technology=SurfaceMount, Number of  Elements=1, Packaging=TapeandReel, Peak Wavelength=660nm, Pin Count=2, Product Depth (mm)=1.6mm, Product Height (mm)=1.1mm, Product Length (mm)=3.2mm, Rad Hardened=No, Shape Type=Rectangular, Type=Uni-Color, Viewing Angle=170deg
L1: library part CMP-0227-00035-1, "SMD-Shielded Power Inductor WE-PD, L = 100 µH", Inductance="100 µH", ComponentLink1Description="Manufacturer Link", ComponentLink1URL=http://www.we-online.com, ComponentLink2Description=Datasheet, ComponentLink2URL=http://www.we-online.de/katalog/media/pdf/7447709101.pdf, DatasheetVersion="ver 1, Oct-2004", PackageDescription="SMD Inductor, 2-Leads, Body 12.0 x 12.0 mm", PackageReference=WE-PD-XXL, PackageVersion=2004
L2: library part CMP-0226-00098-1, "SMD High Current Cube Inductor WE-HCC, L=1.50 µH", Inductance="1.50 µH", ComponentLink1Description="Manufacturer Link", ComponentLink1URL=http://www.we-online.com, ComponentLink2Description=Datasheet, ComponentLink2URL=http://www.we-online.de/katalog/media/pdf/7443340150.pdf, DatasheetVersion="ver 2, Nov-2009", PackageDescription="Inductor, 2-Leads, Body 8.4 x 7.9 mm", PackageReference=WE-HCC-8070, PackageVersion=2009
L3: library part CMP-0220-00079-1, "SMD EMI Suppression Ferrite Bead WE-CBF, Z = 32 Ohm", ComponentLink1Description="Manufacturer Link", ComponentLink1URL=http://www.we-online.com, ComponentLink2Description=Datasheet, ComponentLink2URL=http://www.we-online.de/katalog/media/pdf/7427921.pdf, DatasheetVersion=Dec-2005, Impedance="32 Ohm", PackageDescription="Chip Inductor, 2-Leads, Body 3.2 x 1.6 mm", PackageReference=SMD-1206, PackageVersion=2007
P1: library part CMP-2000-05495-1, "Male Header, Pitch 2.77 mm, 2 Row, 9 Position, Height 12.52 mm, Tail Length 4.8 mm, -55 to 100 degC, RoHS, Tray", Color=Black, Current Rating=5A, Manufacturer=Norcomp, Operating Temperature=-50°C~100°C, Package Description="Male Header, Pitch 2.77 mm, 2 Row, 9 Position, Height 12.52 mm, Tail Length 4.8 mm", Standard Package=80, Voltage Rating=-, 3D Model=171-009-113Rzzz.pdf171-009-113Rzzz.stp171-009-113Rzzz.igs, Associated Product=160-09MA-ND-DUSTCOVERFORDB9MALE, Catalog Drawings=Footprint9,15,25-,37Position171,172SeriesDipSolder, Category=Connectors,Interconnects, Connector Style=D-Sub, Connector Type=Plug,MalePins, Contact Finish=Gold, Contact Finish Thickness=Flash, Contact Type=Signal, Datasheet URL=http://www.norcomp.net/rohspdfs/Connectors/17Y/171/171-YYY-113RYY1.pdf, Datasheet Version="Rev. 11, 09/2015", Family=D-SubConnectors, Features=BoardLock,GroundingIndents, Flange Feature=MatingSide,FemaleScrewlock(4-40), Housing Material=Polyamide(PA9T),Nylon9T, Ingress Protection=-, Manufacturer URL=http://www.norcomp.net/, Mating Products=4209FE-ND-CONND-SUBRCPT9POSVERTSOLDER709FE-ND-CONNDB9CRIMPFEMALENICKEL709FER-ND-CONNDB9CRIMPFEMALETIN186-009-292L001-ND-CONNDSUBRCPT9POSSTRIDC186-009-292L551-ND-CONNDSUBRCPT9POSSTRIDC209F-ND-CONNDSUBRCPT9POSSTRSLDRCUP709F-ND-CONNDB9CRIMPFEMALETIN1709F-ND-CONNDB9CRIMPFEMYLWCHROME4209F-ND-CONND-SUBRCPT9POSVERTSOLDER1709FA-ND-CONNDB9CRIMPFEMYLWCHROME209FEA-ND-CONNDSUBRCPT9POSSTRSLDRCUP, Mounting Technology=ThroughHole, Mounting Type=ThroughHole, Number of Positions=9, Number of Rows=2, Online Catalog=171Series, Other Names=171009113R9119209ME, Other Related Documents=171-009-113R911MaterialDeclaration, Package Reference=171-009-113R911, Packaging=Tray, Product Training Modules=D-SubConnectors, Series=171, Shell Material, Finish=Steel,NickelPlated, Shell Size, Connector Layout=1(DE,E), Termination=Solder
P2: library part CMP-1502-00440-1, "THT Male Header WR-MPC3, Vertical, Single Row, pitch 3 mm, 2 pins", Contact Resistance=10mOhm, Manufacturer="Wurth Elektronik", Operating Temperature=-40to105degC, Working Voltage=250VAC, Datasheet URL=https://katalog.we-online.de/em/datasheet/6620xx11122.pdf, Gender=Male, Manufacturer URL=http://www.we-online.de, Mounting Technology=THT, Orientation=Vertical, Package Reference=66200211122, Packaging=Tube, Part Number=66200211122, Pin Number=2, Pitch=3mm, Publisher=WurthElektronik
P3: library part CMP-2000-05419-1, "Male Header, Pitch 2.54 mm, 1 x 4 Position, Height 10.03 mm, Tail Length 3.56 mm, RoHS, Bulk", Color=White, Current, Rating="5 /  / A", Flammability Rating=UL94V-0, Manufacturer="TE Connectivity", Temperature, Operating="-55to+105 /  / degC", Voltage, Rating="250 /  / V", Agency Approvals=CSA,UL, Angle=Straight, Brand/Series=MTA-100Series, Color, Housing=White, Connector Type=MTA-100, Contact Centerline Spacing="0.100 /  / in.", Contact Mating Area Plating=Tin, Contact Plating=Tin, Contact Shape=Square, Contact Termination Area Plating=Tin, Datasheet URL=https://datasheet.ciiva.com/16286/eng-ds-82056-mta-0608-16286228.pdf, Datasheet Version=Dec-14, Length, Overall="0.4 /  / \"", Length, Pin="0.14 /  / \"", Length, Terminal Post="0.14 /  / in.", Manufacturer URL=http://www.te.com/, Material, Contact=CopperAlloy, Material, Housing=Polyester, Mount Angle=Vertical, Mounting Hole Size="0.04 /  / \"", Mounting Type=PCMount, Number of Contacts=4, Number of Positions=4, Number of Rows=1, Pin Spacing="0.1 /  / \"", Primary Type=InterconnectSystem, Size, Post="0.025 /  / in.", Special Features=Pinstrip, Standards=RoHSCompliant,ELVCompliant,UL94V-0, Termination=Solder, Type=PCBPlug
P4 P5 P6: library part CMP-1024-00327-1, "0.025\" SQ Post Header, Through-hole, Vertical, -55 to 125 degC, 2.54 mm Pitch, 2-Pin, Male, RoHS", Manufacturer=Samtec, PartNumber=TSW-102-26-G-S, Temperature Range="-55 to 125 degC", ComponentLink1Description="Manufacturer URL", ComponentLink1URL=http://www.samtec.com, ComponentLink2Description=Datasheet, ComponentLink2URL=http://www.samtec.com/documents/webfiles/pdf/TSW_TH.PDF, ComponentLink3Description="Package Specification", ComponentLink3URL=http://www.samtec.com/documents/webfiles/cpdf/TSW-XXX-XX-XXX-X-XX-XXX-MKT.pdf, DatasheetVersion=F-214, Mounting Technology=Through-hole, Orientation=Vertical, PackageDescription=".025[0.64] SQ. Post Terminal Strip Assembly", PackageReference=TSW-102-26-XX-S, PackageVersion="DM, 8/1988", Pitch="2.54 mm", RoHS=True
P7: library part CMP-1502-00554-1, "THT Male Header WR-MPC4, Vertical, Single Row, pitch 4.2 mm, 4 pins", Contact Resistance=10mOhm, Manufacturer="Wurth Elektronik", Operating Temperature=-40to105degC, Working Voltage=600VAC, Datasheet URL=https://katalog.we-online.de/em/datasheet/6490xx11122.pdf, Gender=Male, Manufacturer URL=http://www.we-online.de, Mounting Technology=THT, Orientation=Vertical, Package Reference=64900411122, Packaging=Tray, Part Number=64900411122, Pin Number=4, Pitch=4.2mm, Publisher=WurthElektronik
P8: library part CMP-1024-00338-1, "0.025\" SQ Post Header, Through-hole, Vertical, -55 to 125 degC, 2.54 mm Pitch, 6-Pin, Male, RoHS", Manufacturer=Samtec, PartNumber=TSW-103-08-G-D, Temperature Range="-55 to 125 degC", ComponentLink1Description="Manufacturer URL", ComponentLink1URL=http://www.samtec.com, ComponentLink2Description=Datasheet, ComponentLink2URL=http://www.samtec.com/documents/webfiles/pdf/TSW_TH.PDF, ComponentLink3Description="Package Specification", ComponentLink3URL=http://www.samtec.com/documents/webfiles/cpdf/TSW-XXX-XX-XXX-X-XX-XXX-MKT.pdf, DatasheetVersion=F-214, Mounting Technology=Through-hole, Orientation=Vertical, PackageDescription=".025[0.64] SQ. Post Terminal Strip Assembly", PackageReference=TSW-103-08-X-D, PackageVersion="DM, 8/1988", Pitch="2.54 mm", RoHS=True
P9: library part CMP-2000-06636-1, "Male Header, Pitch 2.54 mm, 2 x 3 Position, Height 8.64 mm, Tail Length 3 mm, -40 to 105 degC, RoHS, Bulk", Color=Black, Manufacturer=Harwin-Inc., Package Description="Male Header, Pitch 2.54 mm, 2 x 3 Position, Height 8.64 mm, Tail Length 3 mm", Category=Connectors,Interconnects, Connector Type=Header,Unshrouded,Breakaway, Contact Finish=Tin, Contact Finish Thickness=-, Contact Mating Length="0.240\"(6.10mm)", Contact Type=MalePin, Datasheet URL=https://datasheet.ciiva.com/26899/getdatasheetpartid-483857-26899433.pdf, Datasheet Version=12/2006, Family=RectangularConnectors-Headers,MalePins, Fastening Type=-, Features=-, Manufacturer URL=https://www.harwin.com/, Mounting Technology=ThroughHole, Mounting Type=ThroughHole, Number of Positions=6, Number of Positions Loaded=All, Number of Rows=2, Package Reference=M20-9980346, Packaging=Bulk, Pitch="0.100\"(2.54mm)", Row Spacing="0.100\"(2.54mm)", Series=M20, Termination=Solder
Q1 Q2: library part CMP-1048-00631-1, "General Purpose Transistor, NPN Silicon, 3-Pin SOT-23, Pb-Free, Tape and Reel", Manufacturer="On Semiconductor", PartNumber=MMBT3904LT1G, ComponentLink1Description="Manufacturer URL", ComponentLink1URL=http://www.onsemi.com/, ComponentLink2Description=Datasheet, ComponentLink2URL=http://www.onsemi.cn/pub_link/Collateral/MMBT3904LT1-D.PDF, ComponentLink3Description="Package Specification", ComponentLink3URL=http://www.onsemi.cn/pub_link/Collateral/318-08.PDF, DatasheetVersion="Rev. 12", fT Min (MHz)=300, IC Continuous (A)=0.2, Mounting Technology="Surface Mount", PackageDescription="3-Pin Small Outline Transistor, Body 2.92 x 1.3 mm, Pitch 0.95 mm", PackageReference=SOT-23-3-318-08, PackageVersion="Rev. AP, 11/2009", Packing="Tape and Reel", Polarity=NPN, RoHS=TRUE
R1 R2: library part CMP-2001-03630-1, Manufacturer="Vishay Dale", Part Number=CRCW08051M00FKEA
R3: library part CMP-2000-00296-1, Manufacturer=Panasonic, Part Number=ERJ3EKF1803V
R4: library part CMP-2100-03664-1, "Chip Resistor, 10 KOhm, +/- 1%, 01 W, -55 to 155 degC, 0603 (1608 Metric), RoHS, Tape and Reel", Case/Package=0603, Case Code (Metric)=1608, Manufacturer=Yageo, Max Operating Temperature=155degC, Min Operating Temperature=-55degC, Package Description="2-Pin Surface Mount Device, Body 1.6 x 0.8 mm", Power Rating=100mW, Resistance=10KOhm, Temperature Coefficient=100ppm/degreesC, Tolerance=1%, Voltage Rating=75V, Voltage Rating (DC)=50V, Case Code (Imperial)=0603, Composition=ThickFilm, Datasheet URL=http://www.yageo.com/NewPortal/yageodocoutput?fileName=/pdf/R-Chip/PYu-RC_Group_51_RoHS_L_5.pdf, Datasheet Version="Rev. 5, 10/2016", Depth=0.8mm, Height=0.45mm, Lead Free=LeadFree, Lead Pitch=0.3mm, Length=1.6mm, Manufacturer URL=http://www.yageo.com/, Military Standard=Not, Number of Pins=2, Package Reference=0603, Packaging=TapeandReel, REACH SVHC=NoSVHC, RoHSCompliant=true, Termination=SMD/SMT, Weight=7.1E-05oz, Width=0.8mm
R5 R12 R13 R14 R15: library part CMP-2001-03595-1, Manufacturer="Vishay Dale", Part Number=CRCW08051K00FKEA
R6 R7: library part CMP-2003-00383-1, Manufacturer=Panasonic, Part Number=ERJ-8ENF4640V
R8 R9 R10 R11: library part CMP-1666-00005-4, "Chip Resistor, 10 KOhm, +/- 1%, 100 mW, -55 to 155 degC, 0603 (1608 Metric), RoHS, Tape and Reel", Manufacturer="Vishay Semiconductor", Max Operating Temperature="155 degC", Min Operating Temperature="-55 degC", Package Quantity=5000, Voltage Rating="75 V", ComponentLink1Description="Manufacturer URL", ComponentLink1URL=http://www.vishay.com/, ComponentLink2Description=Datasheet, ComponentLink2URL=https://datasheet.ciiva.com/11809/0900766b80d98afc-11809037.pdf, DatasheetVersion=06/2012, Height="0.45 mm", Length="1.55 mm", Mounting Technology="Surface Mount", PackageDescription="2-Pin Surface Mount Device, Body 1.575 x 0.85 mm", PackageReference=0603, Packaging="Tape and Reel", REACH SVHC=Unknown, RoHSCompliant=true
SW1: library part CMP-2000-05160-1, "6 mm Tact Switche, SPST, NO, -20 to 60 degC, 4-Pin SMT, RoHS, Tape and Reel", Manufacturer="ITT Cannon", Datasheet URL=https://datasheet.ciiva.com/29903/getdatasheetpartid-786341-29903846.pdf, Datasheet Version=Feb-14, Manufacturer URL=http://www.ittcannon.com/
U1: "IC REG BUCK 5V 3A TO263-5", Supplier Part Number 1=LM2576SX-5.0/NOPBCT-ND, Supplier 1=Digi-Key
U2: library part CMP-2000-07282-1, "High Efficiency Single Inductor Buck-Boost Converter, 4 A, 1.8 to 5.5 V Input, 1.2 to 5.5 V Output, -40 to 85 degC, 14-Pin VSON (DSJ), Green (RoHS & no Sb/Br), Tape and Reel", Current - Output=3.5A(Switch), Frequency - Switching=2.4MHz, Manufacturer="Texas Instruments", Manufacturer Product Page=TPS63020DSJTSpecifications, Operating Temperature=-40°C~85°C(TA), Package / Case=14-VFDFNExposedPad, Package Description="14-Pin Small Outline No-lead, Body 4 x 3 mm, Pitch 0.5 mm", Package Reference=DSJ14-4000X1580, Package Version="4208212-3/C, 06/2011", Standard Package=1, Supplier Device Package=14-VSON(4x3), Voltage - Input (Max)=5.5V, Voltage - Input (Min)=1.8V, Voltage - Output (Min/Fixed)=1.2V, Category=IntegratedCircuits(ICs), Datasheet URL=http://www.ti.com/general/docs/lit/getliterature.tsp?genericPartNumber=TPS63020&fileType=pdf, Datasheet Version="Rev. D, 10/2015", Family=PMIC-VoltageRegulators-DCDCSwitchingRegulators, Featured Product=TPS63020Buck-BoostConverterCreateyourpowerdesignnowwithTI’sWEBENCH®Designer, For Use With=296-27260-ND-EVALMODFORTPS63020, Function=Step-Up/Step-Down, Manufacturer URL=http://www.ti.com/, Mounting Technology=SurfaceMount, Mounting Type=SurfaceMount, Number of Outputs=1, Online Catalog=Buck-BoostIC, Other Names=296-27230-6, Output Configuration=Positive, Output Type=Adjustable, Packaging=Digi-Reel®, PCN Assembly/Origin=Assembly/TestSiteAddition10/Jul/2015, Product Training Modules=TPS63020Overview, Reference Design Library=TPS63020EVM-487:3.3V@1A,1.8~5.5Vin, Series=-, Synchronous Rectifier=Yes, Topology=Buck-Boost, Voltage - Output (Max)=5.5V
U3: library part CMP-0237-00079-3, "ARM Cortex-M3 32-bit MCU, 256 KB Flash, 64 KB Internal RAM, 51 I/Os, 64-pin LQFP, -40 to 85 degC, Tray", I/Os (High Current)=51, Operating Frequency(F) (Processor speed) (MHz)=72, Supply Voltage(Vcc) min (V)=2, A/D Converter="2x12-bit (16 Channel)", ComponentLink1Description="Manufacturer URL", ComponentLink1URL=http://www.st.com/web/en/home.html, ComponentLink2Description=Datasheet, ComponentLink2URL=http://www.st.com/st-web-ui/static/active/en/resource/technical/document/datasheet/CD00220364.pdf, ComponentLink3Description="Package Specification", ComponentLink3URL=http://www.st.com/st-web-ui/static/active/en/resource/technical/document/datasheet/DM00037051.pdf, Core="ARM Cortex-M3", D/A Converter="2x12-bit (2 Channel)", DatasheetVersion="Rev. 6", FLASH Size (Prog) (kB)=256, Internal RAM Size (kB)=64, Mounting Technology="Surface Mount", PackageDescription="64-Pin Low Profile Quad Flat Package, 10 x 10 mm Body, 0.5 mm Pitch", PackageReference=LQFP64, PackageVersion="Rev. 4, 06/2013", Packing=Tray, PartNumber=STM32F107RCT6
U4: library part CMP-0186-00138-2, "High-Speed CAN Transceiver, 8-Pin SOIC, Industrial Temperature", Code_IPC=SOIC127P600-8, Code_JEDEC=MS-012, ComponentLink1Description="Manufacturer URL", ComponentLink1URL=http://www.microchip.com/, ComponentLink2Description=Datasheet, ComponentLink2URL=http://ww1.microchip.com/downloads/en/DeviceDoc/21667F.pdf, ComponentLink3Description="Package Specification", ComponentLink3URL=http://www.microchip.com/stellent/groups/techpub_sg/documents/packagingspec/en012702.pdf, DatasheetVersion="revF, Jul-2010", PackageDescription="8-Lead Plastic Small Outline (SN) - Narrow, 3.90mm Body [SOIC]", PackageReference=SOIC-SN8, PackageVersion="revBB, Aug-2009", RevisionNote="URLs added. DatasheetVersion updated."
U6: "802.15.4 Transceiver Module 2.4GHz Antenna Not Included, U.FL Through Hole", Package="Module Digi International", Availability=Unavailable, MF="Digi International", MP=XBP24CAUIT-001, Price=None, SnapEDA_Link=https://www.snapeda.com/parts/XBP24CAUIT-001/Digi%20International/view-part/1219456/?ref=snap
X1: library part CMP-0447-00001-2, "Crystal, 32.768 kHz, 12.5 pF, -40 to 85 degC, SMD Low Profile 3.2 x 1.5 x 0.9 mm, Tape and Reel", Equivalent Series Resistance (R1)="70 Kohm", Frequency="32.768 kHz", Frequency Tolerance @+25degC="+/- 20 ppm", Insulation Resistance (Min)="500 Mohm", Load Capacitance (CL)="12.5 pF", Manufacturer=Abracon, Operating Temperature="-40 to 85 degC", PartNumber=ABS07-32.768KHz-T, Q Value (Type)=30000, Shunt Capacitance (C0)="0.9 to 1.2 pF", ComponentLink1Description="Manufacturer URL", ComponentLink1URL=http://www.abracon.com/, ComponentLink2Description=Datasheet, ComponentLink2URL=http://www.abracon.com/Resonators/ABS07.pdf, ComponentLink3Description="Package Specification", ComponentLink3URL=http://www.abracon.com/Resonators/ABS07.pdf, DatasheetVersion=04.03.13, Drive Level (Type)="0.1 uW", Mounting Technology="Surface Mount", Operation Mode="Flexural Mode (Tuning Fork)", PackageDescription="2-Pin Hand Drawn, Body 3.2x1.5mm, Pitch 2.5mm", PackageReference=ABS07-2, Packing="Tape and Reel"
X2: library part CMP-2000-05033-1, "Miniature Ceramic Crystal, 8 MHz, -40 to 85 degC, 2-Pin SMD, RoHS, Tape and Reel", Case Height=1.3mm, Case Length=5mm, Case Width=3.2mm, Frequency Stability=30PPM, Load Capacitance=18pF, Manufacturer=ABRACON, Operating Temperature Range=-40Cto+85C, Package / Case=5mmx3.2mm, Package Description="2-Pin Surface Mount Device, Body 5 x 3.2 mm", Package Reference=ABM3-2, Tolerance=20PPM, Brand=ABRACON, Datasheet URL=http://www.farnell.com/datasheets/1754353.pdf, Datasheet Version=Sep-13, Dimensions=3.2mmWx5mmLx1.3mmH, ESR=140Ohms, Factory Pack Quantity=1000, Frequency=8MHz, Manufacturer URL=http://www.abracon.com/, Mounting Style=SMD/SMT, Package URL=http://www.abracon.com/Support/PackageDrawing/Resonators/ABM3.PDF, Packaging=Reel, Product Category=Crystals, RoHS=Details, Series=ABM3, Termination Style=SMD/SMT, Type=MiniatureCeramicCrystal
1: DeviceSetName=XBEE_SMD_ADAPTER, GateName_1=G$1, LibraryName=UBCSolar, Package=XBEE_SMD_ADAPTER, SymbolName_1=XBEE_SMD_ADAPTER

## Via types
v1: diameter 15.75, hole 7.87, Top Layer to Bottom Layer, 15 vias

## Nets (pads, with @x,y where several pads share a name; then routed paths per layer and width w, separated by ;. In a path a pad name is that pad's centre, name@x,y a point inside that pad or via, vN(x,y) a via of type N, cw(c..) or ccw(c..) an arc to the next point about the centre after c; other vN are vias at no path point)
5V: C4.1 C5.1 C6.2 C7.2 L1.2 P5.1 U1.4 U2.10 U2.11 U4.3
12V: C1.1 C2.2 C3.2 P2.1 P4.1 U1.1
BOOT0: P9.3 R15.2 U3.60
BOOT1: P9.4 R14.2 U3.28
CANH: P1.7 U4.7
CANL: P1.2 U4.6
GND: 1.1 1.11 1.13 1.22 1.35 C1.2 C2.1 C3.1 C4.2 C5.2 C6.1 C7.1 C8.1 C9.1 C10.1 C11.1 C12.1 C14.2 C15.1 C16.1 C17.1 C18.1 C19.1 C20.1 C21.1 C22.1 C23.1 C24.1 C25.1 C28.1 C29.1 C30.1 D1.1 P1.3 P1.6 P2.2 P3.4 P4.2 P5.2 P6.2 P7.1 P8.3 P9.5 P9.6 Q1.3 Q2.3 R3.1 R4.1 R10.2 R11.2 R12.1 R13.1 R14.1 R15.1 SW1.2 U1.3 U1.5 U2.2 U3.12 U3.18 U3.31 U3.47 U3.63 U4.2 U6.10
Net1_2: 1.2 C13.1 C27.1
Net1_3: 1.3 U3.43
Net1_4: 1.4 R5.1 U3.42
Net1_6: 1.6 C28.2 U3.36
Net1_7: 1.7 U3.27
Net1_10: 1.10 U3.34
Net1_28: 1.28 DS3.1 R8.1
Net1_29: 1.29 U3.35
NetC11_2: C11.2 U2.1 U2.12 U2.13
NetC12_2: C12.2 U3.23 U6.5
NetC22_2: C22.2 U3.3 X1.1
NetC23_2: C23.2 U3.4 X1.2
NetC24_2: C24.2 U3.5 X2.1
NetC25_2: C25.2 X2.2
NetC26_1: C26.1 SW1.3
NetC26_2: C26.2 SW1.1
NetD1_2: D1.2 L1.1 U1.2
NetDS1_2: DS1.2 R6.2
NetDS2_2: DS2.2 R7.2
NetDS3_2: DS3.2 R12.2
NetDS4_1: DS4.1 R9.1 U6.15
NetDS4_2: DS4.2 R13.2
NetL2_1: L2.1 U2.6
NetL2_2: L2.2 U2.8
NetQ1_1: Q1.1 R8.2 R10.1
NetQ1_2: Q1.2 R6.1
NetQ2_1: Q2.1 R9.2 R11.1
NetQ2_2: Q2.2 R7.1
NetR1_1: R1.1 R3.2 U2.3
NetR2_1: R2.1 U2.14
NetR4_2: R4.2 U4.8
NetU3_29: U3.29 U6.3
NetU3_30: U3.30 U6.2
NetU3_44: U3.44 U6.6
NetU3_45: U3.45 U6.9
NetU3_50: U3.50 U6.16
NRST: P8.5 SW1.4 U3.7
PB6: P3.3 U3.58 U4.4
PB7: P3.2 U3.59 U4.1
SWCLK: P7.2 P8.2 U3.49
SWDIO: P7.3 P8.4 U3.46
V3.3: 1.27 C8.2 C9.2 C10.2 C13.2 C16.2 C17.2 C18.2 C19.2 C20.2 C21.2 C27.2 C29.2 C30.2 DS1.1 DS2.1 L3.1 P3.1 P6.1 P7.4 P8.1 P9.1 P9.2 R1.2 R2.2 R5.2 U2.4 U3.1 U3.19 U3.32 U3.48 U3.64 U6.1 U6.14
VDDA: C14.1 C15.2 L3.2 U3.13
pads on no net: 1.5 1.8 1.9 1.12 1.14 1.15 1.16 1.17 1.18 1.19 1.20 1.21 1.23 1.24 1.25 1.26 1.30 1.31 1.32 1.33 1.34 1.36 1.37 P1.1 P1.4 P1.5 P1.8 P1.9 P1.MH1 P1.MH2 P2.MH1 P2.MH2 P8.6 U1.6 U2.5 U2.7 U2.9 U2.15 U3.2 U3.6 U3.8 U3.9 U3.10 U3.11 U3.14 U3.15 U3.16 U3.17 U3.20 U3.21 U3.22 U3.24 U3.25 U3.26 U3.33 U3.37 U3.38 U3.39 U3.40 U3.41 U3.51 U3.52 U3.53 U3.54 U3.55 U3.56 U3.57 U3.61 U3.62 U4.5 U6.4 U6.7 U6.8 U6.11 U6.12 U6.13 U6.17 U6.18 U6.19 U6.20
copper on no net:
  other v1: 7990.31,1540.35 8010,1540.35 8029.69,1540.35 7990.31,1560.04 8010,1560.04 8029.69,1560.04 7990.31,1579.72 8010,1579.72 8029.69,1579.72 7990.31,1599.41 8010,1599.41 8029.69,1599.41 7990.31,1619.09 8010,1619.09 8029.69,1619.09